# EAGLE board sumo2 (EAGLE 8.3.2)
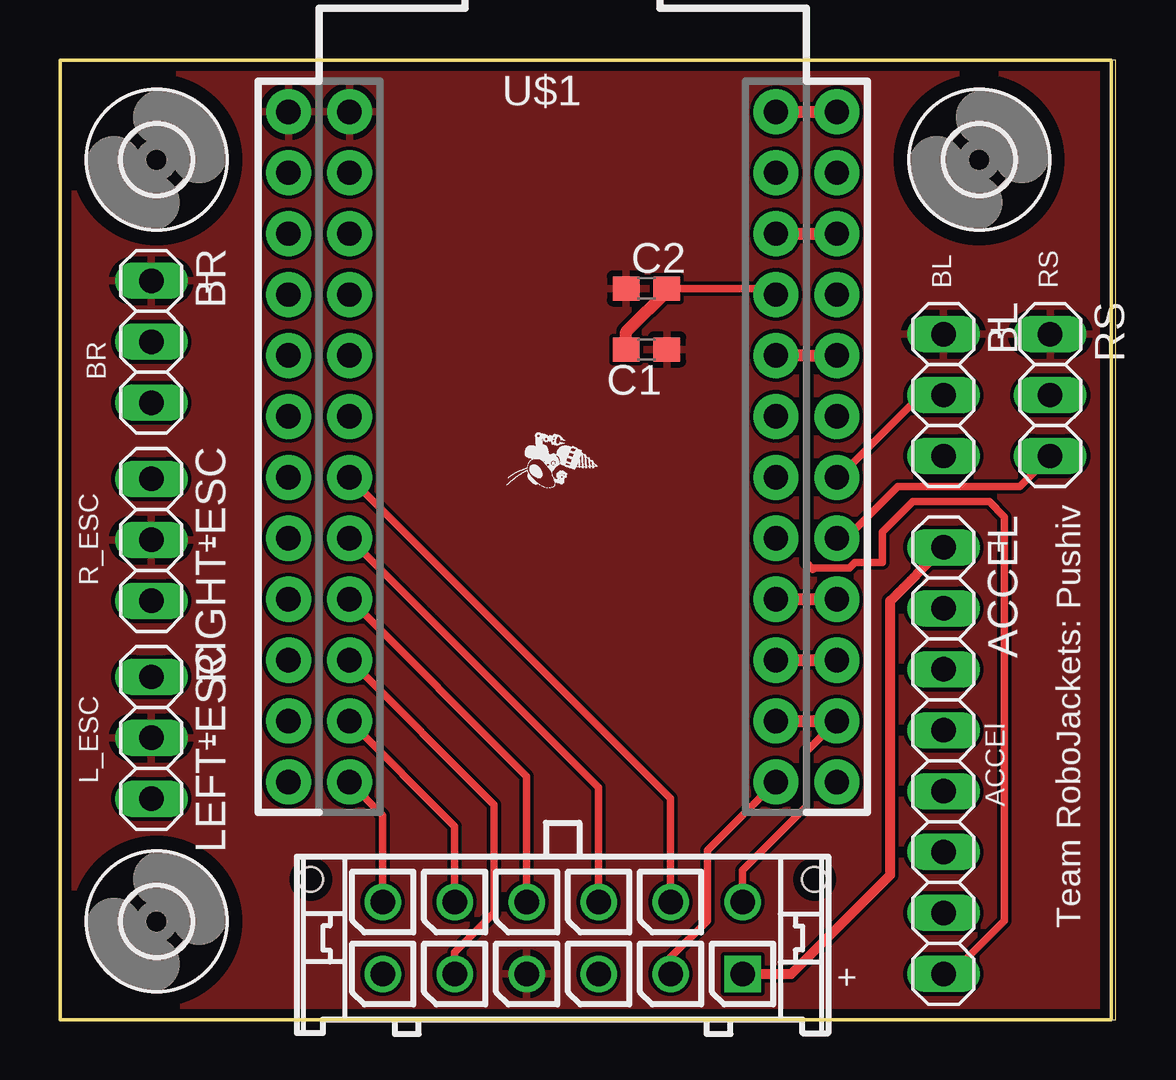
[diagram p0: board, top side]
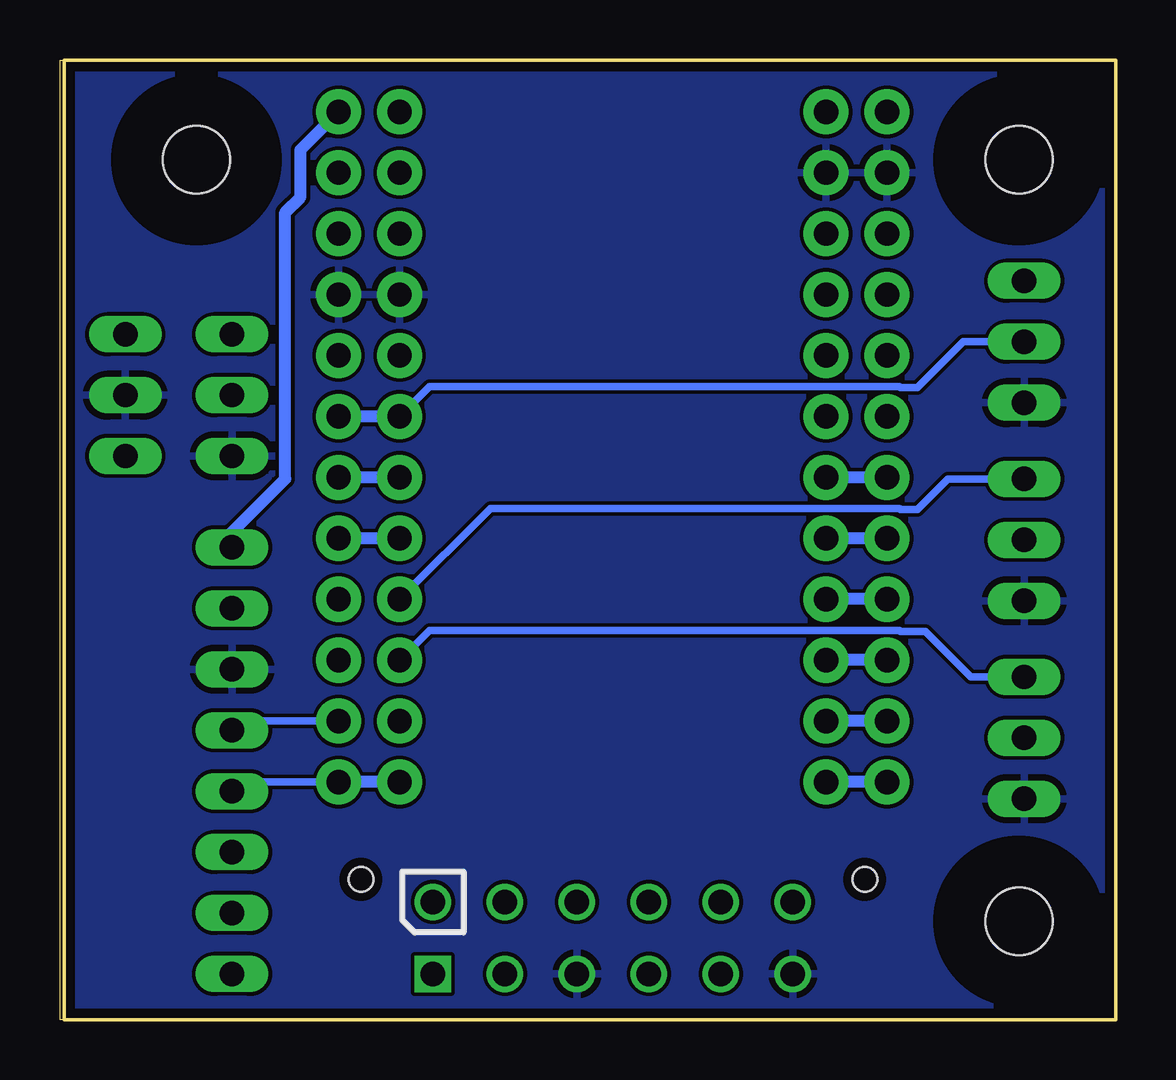
[diagram p1: board, bottom side, seen from below]

Size 44 x 40.01 mm. Coordinates in mm from the lower left corner, seen from the top.
Outline: 43.81,0 44,0 44,40 0,40 0,0
Outline: 0,0 43.81,0
Outline: 43.81,0 43.81,40.01 0,40.01 0,0
Copper layers (1*16): Top 0.035559375mm / dielectric 1.6mm / Bottom 0.035559375mm
Design rules "oshpark-2layer": minimum track width 6mil, minimum drill 10mil, track to track 6mil, track to pad 6mil, pad to pad 6mil, via to via 6mil, smd to smd 6mil, copper to edge 15mil, drill to drill 6mil, minimum pad ring 5mil, minimum via ring 5mil, stop-mask expansion 2.5mil, vias tented up to drill 0mil, thermal gap 10mil

## Footprints (pad centres in the part's own frame; a part is rotated, then mirrored left to right if it is on the bottom)
1X08 = drill 1.016 long: 1 -8.89,0; 2 -6.35,0; 3 -3.81,0; 4 -1.27,0; 5 1.27,0; 6 3.81,0; 7 6.35,0; 8 8.89,0
1X03 = drill 1.016 long: 1 -2.54,0; 2 0,0; 3 2.54,0
C0603 = smd 1.1 x 1: 1 -0.85,0; 2 0.85,0
PHOTON_STACKABLE = drill 1.016 pad 1.88: 1 1.27,32.258; 2 1.27,29.718; 3 1.27,27.178; 4 1.27,24.638; 5 1.27,22.098; 6 1.27,19.558; 7 1.27,17.018; 8 1.27,14.478; 9 1.27,11.938; 10 1.27,9.398; 11 1.27,6.858; 12 1.27,4.318; 13 19.05,4.318; 14 19.05,6.858; 15 19.05,9.398; 16 19.05,11.938; 17 19.05,14.478; 18 19.05,17.018; 19 19.05,19.558; 20 19.05,22.098; 21 19.05,24.638; 22 19.05,27.178; 23 19.05,29.718; 24 19.05,32.258; #13 21.59,4.318; #14 21.59,6.858; #15 21.59,9.398; #16 21.59,11.938; #17 21.59,14.478; #18 21.59,17.018; #19 21.59,19.558; #20 21.59,22.098; #21 21.59,24.638; #22 21.59,27.178; #23 21.59,29.718; #24 21.59,32.258; @1 -1.27,32.258; @2 -1.27,29.718; @3 -1.27,27.178; @4 -1.27,24.638; @5 -1.27,22.098; @6 -1.27,19.558; @7 -1.27,17.018; @8 -1.27,14.478; @9 -1.27,11.938; @10 -1.27,9.398; @11 -1.27,6.858; @12 -1.27,4.318
2,8 = hole 2.8: 0,0
43045-1212 = drill 1.02 square: P$1 7.5,0 | drill 1.02: P$2 4.5,0; P$3 1.5,0; P$4 -1.5,0; P$5 -4.5,0; P$6 -7.5,0; P$7 7.5,3; P$8 4.5,3; P$9 1.5,3; P$10 -1.5,3; P$11 -4.5,3; P$12 -7.5,3 | hole 1.02: 10.5,3.94; -10.5,3.94

## Placement (x,y rotation side)
ACCEL  [1X08]  36.83,10.79 270 top
BL  [1X03]  36.83,26.04 270 top
BR  [1X03]  3.81,28.26 270 top
C1  100nF  [C0603]  24.45,27.94 180 top
C2  1uF  [C0603]  24.45,30.48 0 top
LEFT-ESC  [1X03]  3.81,11.75 270 top
RIGHT-ESC  [1X03]  3.81,20 270 top
RS  [1X03]  41.27,26.04 270 top
U$1  PHOTON_WITH_STACKABLE_HEADERS  [PHOTON_STACKABLE]  10.79,5.59 0 top
U$2  [2,8]  4.03,35.85 0 top
U$3  [2,8]  4.03,4.1 0 top
U$4  [2,8]  38.32,35.85 0 top
U$7  [ROBOBUZZ_0.2X]  22.42,23.05 90 top
X1  [43045-1212]  20.95,1.91 0 top

## Library data of the parts
ACCEL BL BR LEFT-ESC RIGHT-ESC RS = pinhead
C1 C2 = rcl
U$1 = Spark
U$2-U$4 = holes
U$7 = RoboJackets-Aesthetics
X1 = con-molex-micro-fit-3_0

## Nets
3V3: ACCEL.1 U$1.24 U$1.#24 X1.P$1
BL: BL.2 U$1.18 U$1.#18
BR: BR.2 U$1.19 U$1.#19
FL: U$1.8 U$1.@8 X1.P$9
FR: U$1.7 U$1.@7 X1.P$8
GND: ACCEL.3 BL.3 BR.3 C1.2 C2.2 LEFT-ESC.3 RIGHT-ESC.3 RS.2 U$1.2 U$1.21 U$1.#21 U$1.@2 X1.P$3 X1.P$6
INT: ACCEL.8 U$1.20 U$1.#20
L_PWM: LEFT-ESC.1 U$1.15 U$1.#15
R_PWM: RIGHT-ESC.1 U$1.16 U$1.#16
RAW: BL.1 BR.1 C1.1 C2.1 LEFT-ESC.2 RIGHT-ESC.2 RS.1 U$1.1 U$1.@1 X1.P$4
RS-OUT: RS.3 U$1.17 U$1.#17
SCL: ACCEL.4 U$1.14 U$1.#14 X1.P$7
SDA: ACCEL.5 U$1.13 U$1.#13 X1.P$2
SHDN_LL: U$1.12 U$1.@12 X1.P$12
SHDN_LM: U$1.11 U$1.@11 X1.P$11
SHDN_RM: U$1.10 U$1.@10 X1.P$5
SHDN_RR: U$1.9 U$1.@9 X1.P$10
VBAT: U$1.22 U$1.#22

## Tracks (layer width: path | path; a pad name or v marks a point on that pad's centre or on a via)
3V3
  Top 0.406: X1.P$1 30.48,1.91 34.61,6.03 34.61,17.46 ACCEL.1
  Top 0.508: U$1.24 U$1.#24
  Bottom 0.508: ACCEL.1 36.83,20.32 34.61,22.54 34.61,33.66 33.97,34.29 33.97,36.26 U$1.#24
BL
  Top 0.305: U$1.#18 32.45,22.61 35.88,26.04 BL.2
  Bottom 0.508: U$1.18 U$1.#18
BR
  Bottom 0.305: BR.2 6.35,28.26 8.26,26.35 8.97,26.35 9.01,26.39 28.6,26.39 U$1.19
  Bottom 0.508: U$1.19 U$1.#19
FL
  Top 0.305: X1.P$9 22.45,9.68 U$1.8
  Bottom 0.508: U$1.@8 U$1.8
FR
  Top 0.305: X1.P$8 25.45,9.22 U$1.7
  Bottom 0.508: U$1.@7 U$1.7
GND
  Top 0.305: C2.2 25.4,30.48 29.59,30.48 U$1.21
  Top 0.508: C1.2 23.6,28.68 25.4,30.48
  pour Bottom: 0,40.01 43.81,40.01 43.81,0 0,0
INT
  Top 0.305: ACCEL.8 37.15,1.91 39.37,4.13 39.37,20.95 38.73,21.59 35.56,21.59 34.29,20.32 34.29,19.05 33.13,19.05 32.9,18.82 31.45,18.82 31.39,18.77 31.11,19.05 31.11,27.69
  Top 0.508: U$1.20 31.11,27.69 U$1.#20
L_PWM
  Top 0.508: U$1.15 U$1.#15
  Bottom 0.305: LEFT-ESC.1 6.03,14.29 7.94,16.19 8.97,16.19 9.01,16.23 28.6,16.23 U$1.15
R_PWM
  Top 0.508: U$1.16 U$1.#16
  Bottom 0.305: RIGHT-ESC.1 6.99,22.54 8.26,21.27 8.97,21.27 9.01,21.31 26.06,21.31 U$1.16
RAW
  pour Top: 0,40.01 43.81,40.01 43.81,0 0,0
RS-OUT
  Top 0.305: U$1.#17 32.77,20.07 34.92,22.23 40.01,22.23 RS.3
  Bottom 0.508: U$1.17 U$1.#17
SCL
  Top 0.305: X1.P$7 28.45,6.23 31.11,8.89 31.11,11.18 32.19,12.26 U$1.#14
  Top 0.508: U$1.14 32,12.45 32.19,12.26
  Bottom 0.305: U$1.#14 36.45,12.45 ACCEL.4
SDA
  Top 0.305: X1.P$2 25.45,2.6 26.99,4.13 26.99,7.05 U$1.13
  Bottom 0.305: U$1.#13 36.45,9.91 ACCEL.5
  Bottom 0.508: U$1.13 U$1.#13
SHDN_LL
  Top 0.305: X1.P$12 13.46,8.52 U$1.12
  Bottom 0.508: U$1.@12 U$1.12
SHDN_LM
  Top 0.305: X1.P$11 16.45,8.06 U$1.11
  Bottom 0.508: U$1.@11 U$1.11
SHDN_RM
  Top 0.305: X1.P$5 16.45,2.8 18.1,4.45 18.1,8.95 U$1.10
  Bottom 0.508: U$1.@10 U$1.10
SHDN_RR
  Top 0.305: X1.P$10 19.45,10.14 U$1.9
  Bottom 0.508: U$1.@9 U$1.9
VBAT
  Top 0.508: U$1.22 U$1.#22

## Text on the board
tPlace: + | BL | RS | + | BR | + | + | R_ESC | + | L_ESC | ACCEl | Team RoboJackets: Pushiv | +